# EAGLE board CT_schematic (EAGLE 7.6.0)

Size 100 x 80 mm. Coordinates in mm from the lower left corner, seen from the top.
Outline: 0,0 100,0 100,80 0,80 0,0
Copper layers (1*16): Top 0.035mm / dielectric 1.5mm / Bottom 0.035mm
Design rules "default": minimum track width 10mil, minimum drill 24mil, track to track 8mil, track to pad 8mil, pad to pad 8mil, via to via 8mil, smd to smd 8mil, copper to edge 40mil, drill to drill 8mil, minimum pad ring 10mil, minimum via ring 8mil, stop-mask expansion 4mil, vias tented up to drill 0mil, thermal gap 10mil

## Footprints (pad centres in the part's own frame; a part is rotated, then mirrored left to right if it is on the bottom)
C0603 = smd 0.8 x 0.8: 1 -0.762,0; 2 0.762,0
C0402 = smd 0.5 x 0.5: 1 -0.508,0; 2 0.508,0
C0805 = smd 1.2 x 1.3: 1 -1.016,0; 2 1.016,0
C1210 = smd 1.2 x 2.5: 1 -1.524,0; 2 1.524,0
C1206 = smd 1.3 x 1.6: 1 -1.524,0; 2 1.524,0
L0603 = smd 0.8 x 0.8: 1 -0.762,0; 2 0.762,0
R0603 = smd 0.8 x 0.8: 1 -0.762,0; 2 0.762,0
WLCSP25 = smd 0.32 x 0.32: A1 -0.8,0.8; A2 -0.4,0.8; A3 0,0.8; A4 0.4,0.8; A5 0.8,0.8; B1 -0.8,0.4; B2 -0.4,0.4; B3 0,0.4; B4 0.4,0.4; B5 0.8,0.4; C1 -0.8,0; C2 -0.4,0; C3 0,0; C4 0.4,0; C5 0.8,0; D1 -0.8,-0.4; D2 -0.4,-0.4; D3 0,-0.4; D4 0.4,-0.4; D5 0.8,-0.4; E1 -0.8,-0.8; E2 -0.4,-0.8; E3 0,-0.8; E4 0.4,-0.8; E5 0.8,-0.8
TSSOP20-I = smd 0.4 x 1.35: 1 -2.925,-2.875; 2 -2.275,-2.875; 3 -1.625,-2.875; 4 -0.975,-2.875; 5 -0.325,-2.875; 6 0.325,-2.875; 7 0.975,-2.875; 8 1.625,-2.875; 9 2.275,-2.875; 10 2.925,-2.875; 11 2.925,2.875; 12 2.275,2.875; 13 1.625,2.875; 14 0.975,2.875; 15 0.325,2.875; 16 -0.325,2.875; 17 -0.975,2.875; 18 -1.625,2.875; 19 -2.275,2.875; 20 -2.925,2.875
182-009-MALE = drill 1.194 pad 1.524 octagon: 1 -5.537,10.923; 2 -2.769,10.923; 3 0,10.923; 4 2.769,10.923; 5 5.537,10.923; 6 -4.153,8.08; 7 -1.384,8.08; 8 1.384,8.08; 9 4.153,8.08 | hole 3.048: -12.446,9.501; 12.446,9.501
XB24CZ7UIS-004 = smd 2.84 x 1.52: 1 -10,6; 2 -10,4; 3 -10,2; 4 -10,0; 5 -10,-2; 6 -10,-4; 7 -10,-6; 8 -10,-8; 9 -10,-10; 10 -10,-12; 11 -10,-14; 12 -10,-16; 13 -10,-18; 21 10,-18; 22 10,-16; 23 10,-14; 24 10,-12; 25 10,-10; 26 10,-8; 27 10,-6; 28 10,-4; 29 10,-2; 30 10,0; 31 10,2; 32 10,4; 33 10,6; 34 10,8; 35 10,10; 36 10,12; 37 10,14 | smd 1.52 x 2.84: 14 -6,-19.68; 15 -4,-19.68; 16 -2,-19.68; 17 0,-19.68; 18 2,-19.68; 19 4,-19.68; 20 6,-19.68
ABS07-32.768KHZ-7-T = smd 1.1 x 2.4: 1 -2.5,0; 2 0,0
ASFL1 = smd 1.7 x 1.5: 1 -1.27,-1.1; 2 1.27,-1.1; 3 1.27,1.1; 4 -1.27,1.1
SOIC-8_EP = smd 1.6 x 0.533: 1 -2.921,1.905; 2 -2.921,0.635; 3 -2.921,-0.635; 4 -2.921,-1.905; 5 2.921,-1.905; 6 2.921,-0.635; 7 2.921,0.635; 8 2.921,1.905 | smd 2.54 x 3.302: EPAD 0,0 | drill 0.406 pad 0.406: P$1 -0.508,0.635; P$2 0.381,0.635; P$3 -0.508,-0.635; P$4 0.381,-0.635
DFN8_2X3MC = smd 0.813 x 0.305: 1 -1.398,0.75; 2 -1.398,0.25; 3 -1.398,-0.25; 4 -1.398,-0.75; 5 1.398,-0.75; 6 1.398,-0.25; 7 1.398,0.25; 8 1.398,0.75 | smd 1.753 x 1.549: 9 0,0
JST-2-SMD = smd 1 x 4.6: 1 -1,-3.7; 2 1,-3.7 | smd 1.6 x 3.4: NC1 -3.4,1.5; NC2 3.4,1.5
FCI_10118193-0001LF = smd 0.4 x 1.35: 1 -1.3,2.675; 2 -0.65,2.675; 3 0,2.675; 4 0.65,2.675; 5 1.3,2.675 | smd 1.6 x 1.4: 6 -3.2,2.45; 7 3.2,2.45 | smd 1.9 x 1.9: 8 -1.2,0; 9 1.2,0 | hole 0.5: -3.3,0; 3.3,0
SON-6 = smd 0.55 x 0.3: 1 -0.355,0.5 | smd 0.52 x 0.3: 2 -0.37,0; 3 -0.37,-0.5; 4 0.37,-0.5; 5 0.37,0; 6 0.37,0.5
SW_4-1437565-2 = smd 1.4 x 2.1: 1 -2.23,4.55; 2 -2.23,-4.55; 3 2.23,4.55; 4 2.23,-4.55
LGM67K-G1J2-24-Z = smd 0.8 x 1.4: A -2,0; C 0,0
NC7SZ125M5X = smd 1.3 x 0.7: 1 -1.3,0.95; 2 -1.3,0; 3 -1.3,-0.95; 4 1.3,-0.95; 5 1.3,0.95

## Placement (x,y rotation side)
C1  1e-07  [C0603]  -71.12,71.12 0 top  (outside the outline)
C2  1e-07  [C0603]  -74.93,71.12 0 top  (outside the outline)
C3  1e-07  [C0603]  -15.24,76.2 0 top  (outside the outline)
C4  1e-07  [C0603]  -19.05,76.2 0 top  (outside the outline)
C5  4.7e-06  [C0603]  -63.5,71.12 0 top  (outside the outline)
C6  1e-08  [C0603]  -22.86,76.2 0 top  (outside the outline)
C7  1e-06  [C0603]  -26.67,76.2 0 top  (outside the outline)
C8  1e-11  [C0402]  -66.04,76.2 0 top  (outside the outline)
C9  1e-11  [C0402]  -69.85,76.2 0 top  (outside the outline)
C10  1e-07  [C0402]  -73.66,76.2 0 top  (outside the outline)
C11  1e-07  [C0402]  -15.24,81.28 0 top  (outside the outline)
C12  1e-07  [C0402]  -19.05,81.28 0 top  (outside the outline)
C13  1e-07  [C0402]  -22.86,81.28 0 top  (outside the outline)
C14  1e-07  [C0402]  -26.67,81.28 0 top  (outside the outline)
C15  1e-07  [C0402]  -30.48,81.28 0 top  (outside the outline)
C16  1e-05  [C0805]  -15.24,71.12 0 top  (outside the outline)
C17  1e-07  [C0402]  -34.29,81.28 0 top  (outside the outline)
C18  4.7e-11  [C0402]  -62.23,76.2 0 top  (outside the outline)
C19  8.2e-12  [C0603]  -67.31,71.12 0 top  (outside the outline)
C20  1e-08  [C0402]  -38.1,81.28 0 top  (outside the outline)
C21  1e-05  [C1210]  -29.21,64.77 0 top  (outside the outline)
C22  1e-05  [C1210]  -35.56,64.77 0 top  (outside the outline)
C23  1e-05  [C1210]  -41.91,64.77 0 top  (outside the outline)
C24  1e-05  [C1210]  -48.26,64.77 0 top  (outside the outline)
C25  1e-07  [C0402]  -41.91,81.28 0 top  (outside the outline)
C26  1e-05  [C1206]  -54.61,64.77 0 top  (outside the outline)
C27  1e-05  [C1206]  -60.96,64.77 0 top  (outside the outline)
C28  1e-08  [C0402]  -45.72,81.28 0 top  (outside the outline)
C29  1e-08  [C0402]  -49.53,81.28 0 top  (outside the outline)
F1  240.0  [L0603]  -30.48,76.2 0 top  (outside the outline)
R1  10000.0  [R0603]  -39.37,71.12 0 top  (outside the outline)
R2  1000.0  [R0603]  -34.29,76.2 0 top  (outside the outline)
R3  1600.5  [R0603]  -38.1,76.2 0 top  (outside the outline)
R4  4700.0  [R0603]  -41.91,76.2 0 top  (outside the outline)
R5  4700.0  [R0603]  -45.72,76.2 0 top  (outside the outline)
R6  10000.0  [R0603]  -44.45,71.12 0 top  (outside the outline)
R7  4031.5447154472  [R0603]  -24.13,71.12 0 top  (outside the outline)
R8  2200.0  [R0603]  -49.53,76.2 0 top  (outside the outline)
R9  10000.0  [R0603]  -49.53,71.12 0 top  (outside the outline)
R10  10000.0  [R0603]  -54.61,71.12 0 top  (outside the outline)
R11  9100.0  [R0603]  -53.34,76.2 0 top  (outside the outline)
R12  680000.0  [R0603]  -29.21,71.12 0 top  (outside the outline)
R13  120000.0  [R0603]  -34.29,71.12 0 top  (outside the outline)
R14  2000.0  [R0603]  -57.15,76.2 0 top  (outside the outline)
R15  10000.0  [R0603]  -59.69,71.12 0 top  (outside the outline)
U1  STM32L011E4Y6  [WLCSP25]  -63.5,80.01 0 top  (outside the outline)
U2  SP3203ECY-L/TR  [TSSOP20-I]  -43.18,45.72 0 top  (outside the outline)
U3  182-009-113R531  [182-009-MALE]  -62.23,6.35 0 top  (outside the outline)
U4  XB24CZ7UIS-004  [XB24CZ7UIS-004]  -25.4,21.59 0 top  (outside the outline)
U5  ABS07-32.768KHZ-7-T  [ABS07-32.768KHZ-7-T]  -55.88,55.88 0 top  (outside the outline)
U6  ASFL1-12MHZ-NCS  [ASFL1]  -26.67,55.88 0 top  (outside the outline)
U7  MIC5234YME  [SOIC-8_EP]  -64.77,54.61 0 top  (outside the outline)
U8  MCP73831T-2ACI/MC  [DFN8_2X3MC]  -72.39,80.01 0 top  (outside the outline)
U9  S2B-PH-SM4-TB(LF)(SN)  [JST-2-SMD]  -57.15,45.72 0 top  (outside the outline)
U10  10118193-0001LF  [FCI_10118193-0001LF]  -35.56,55.88 0 top  (outside the outline)
U11  TPS3895ADRYR  [SON-6]  -66.04,80.01 0 top  (outside the outline)
U12  4-1437565-2  [SW_4-1437565-2]  -27.94,45.72 0 top  (outside the outline)
U13  Q65110A2395  [LGM67K-G1J2-24-Z]  -17.78,64.77 0 top  (outside the outline)
U14  nc7sz125m5x  [NC7SZ125M5X]  -66.04,63.5 0 top  (outside the outline)
U15  nc7sz125m5x  [NC7SZ125M5X]  -72.39,63.5 0 top  (outside the outline)

## Library data of the parts
C1-C29 F1 R1-R15 U1-U15 = circuit_tree

## Nets
CLK_CRYSTAL_U1_B5: C8.1 U1.B5 U5.1
CLK_CRYSTAL_U1_C5: C9.1 U1.C5 U5.2
GND: C1.2 C2.2 C3.2 C4.2 C5.2 C6.2 C7.2 C8.2 C9.2 C10.2 C11.2 C14.2 C15.2 C16.2 C17.2 C18.2 C19.2 C20.2 C21.2 C22.2 C23.2 C24.2 C25.2 C26.2 C27.2 C28.2 C29.2 R2.2 R6.2 R8.2 R11.2 R13.2 R14.2 U1.E1 U2.18 U3.5 U4.1 U4.11 U4.13 U4.22 U4.35 U6.2 U7.7 U7.EPAD U8.6 U8.9 U9.2 U10.5 U10.6 U10.7 U10.8 U10.9 U11.2 U13.C U14.1 U14.3 U15.1 U15.3
INPUT_USBPOWER_5V: C26.1 R15.2 U8.1 U8.2 U10.1
NET_U1_A5: R6.1 U1.A5
NET_U1_C4: C6.1 C7.1 F1.1 U1.C4
NET_U1_D5: R5.1 U1.D5 U15.4
NET_U1_E4: R3.1 U1.E4 U13.A
NET_U1_E5: R1.1 U1.E5 U6.3 U12.3 U12.4
NET_U2_1: C12.1 U2.1
NET_U2_2: C14.1 U2.2
NET_U2_3: C12.2 U2.3
NET_U2_4: C13.1 U2.4
NET_U2_5: C13.2 U2.5
NET_U2_6: C15.1 U2.6
NET_U2_20: U2.20
NET_U3_2: U2.14 U3.2
NET_U3_3: U2.17 U3.3
NET_U3_7: U2.13 U3.7
NET_U3_8: U2.16 U3.8
NET_U4_6: R4.1 U4.6 U14.4
NET_U7_4: R7.2 R8.1 U7.4
NET_U8_5: R15.1 U8.5
NET_U8_8: R14.1 U8.8
NET_U11_1: R10.1 R11.1 U11.1
NET_U11_3: R12.2 R13.1 U11.3
NET_U11_4: R9.1 U11.4 U14.2 U15.2
NET_U12_1: R2.1 U12.1 U12.2
PROC_LPUART1_CTS: U1.E3 U2.8
PROC_LPUART1_RTS: U1.D2 U2.10
PROC_LPUART1_RX: U1.A1 U2.11
PROC_LPUART1_TX: U1.A2 U2.7
PROC_SPI1_MISO: U1.E2 U4.17
PROC_SPI1_MOSI: U1.C3 U4.16
PROC_SPI1_NSS: U1.B3 U4.15
PROC_SPI1_SCK: U1.B2 U4.14
VCC_S1_3V7: C21.1 C22.1 C27.1 U7.5 U7.8 U8.3 U8.4 U9.1
VCC_TIER1_3V3: C1.1 C2.1 C3.1 C4.1 C5.1 C10.1 C11.1 C16.1 C17.1 C18.1 C19.1 C20.1 C23.1 C24.1 C25.1 C28.1 C29.1 F1.2 R1.2 R3.2 R4.2 R5.2 R7.1 R9.2 R10.2 R12.1 U1.D1 U2.12 U2.19 U4.2 U4.27 U6.4 U7.1 U11.6 U14.5 U15.5

## Tracks (layer width: path | path; a pad name or v marks a point on that pad's centre or on a via)
CLK_CRYSTAL_U1_B5  (2 unrouted)
CLK_CRYSTAL_U1_C5  (2 unrouted)
GND  (57 unrouted)
INPUT_USBPOWER_5V  (4 unrouted)
NET_U1_A5  (1 unrouted)
NET_U1_C4  (3 unrouted)
NET_U1_D5  (2 unrouted)
NET_U1_E4  (2 unrouted)
NET_U1_E5  (4 unrouted)
NET_U2_1  (1 unrouted)
NET_U2_2  (1 unrouted)
NET_U2_3  (1 unrouted)
NET_U2_4  (1 unrouted)
NET_U2_5  (1 unrouted)
NET_U2_6  (1 unrouted)
NET_U3_2  (1 unrouted)
NET_U3_3  (1 unrouted)
NET_U3_7  (1 unrouted)
NET_U3_8  (1 unrouted)
NET_U4_6  (2 unrouted)
NET_U7_4  (2 unrouted)
NET_U8_5  (1 unrouted)
NET_U8_8  (1 unrouted)
NET_U11_1  (2 unrouted)
NET_U11_3  (2 unrouted)
NET_U11_4  (3 unrouted)
NET_U12_1  (2 unrouted)
PROC_LPUART1_CTS  (1 unrouted)
PROC_LPUART1_RTS  (1 unrouted)
PROC_LPUART1_RX  (1 unrouted)
PROC_LPUART1_TX  (1 unrouted)
PROC_SPI1_MISO  (1 unrouted)
PROC_SPI1_MOSI  (1 unrouted)
PROC_SPI1_NSS  (1 unrouted)
PROC_SPI1_SCK  (1 unrouted)
VCC_S1_3V7  (7 unrouted)
VCC_TIER1_3V3  (35 unrouted)